# EAGLE board Main PCB (EAGLE 9.5.2)
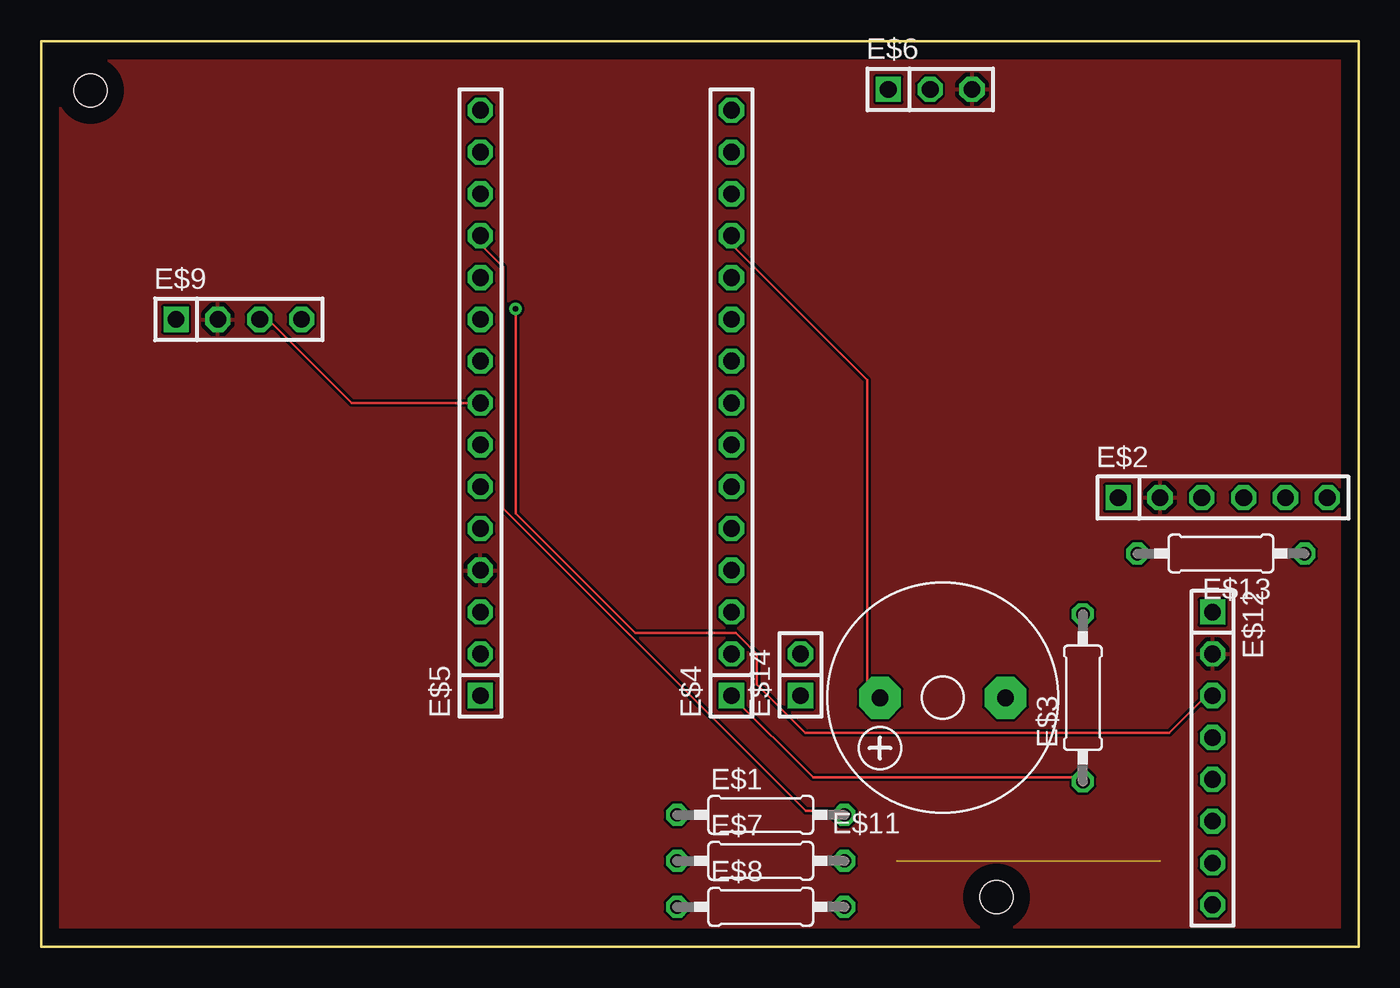
[diagram p0: board, top side]
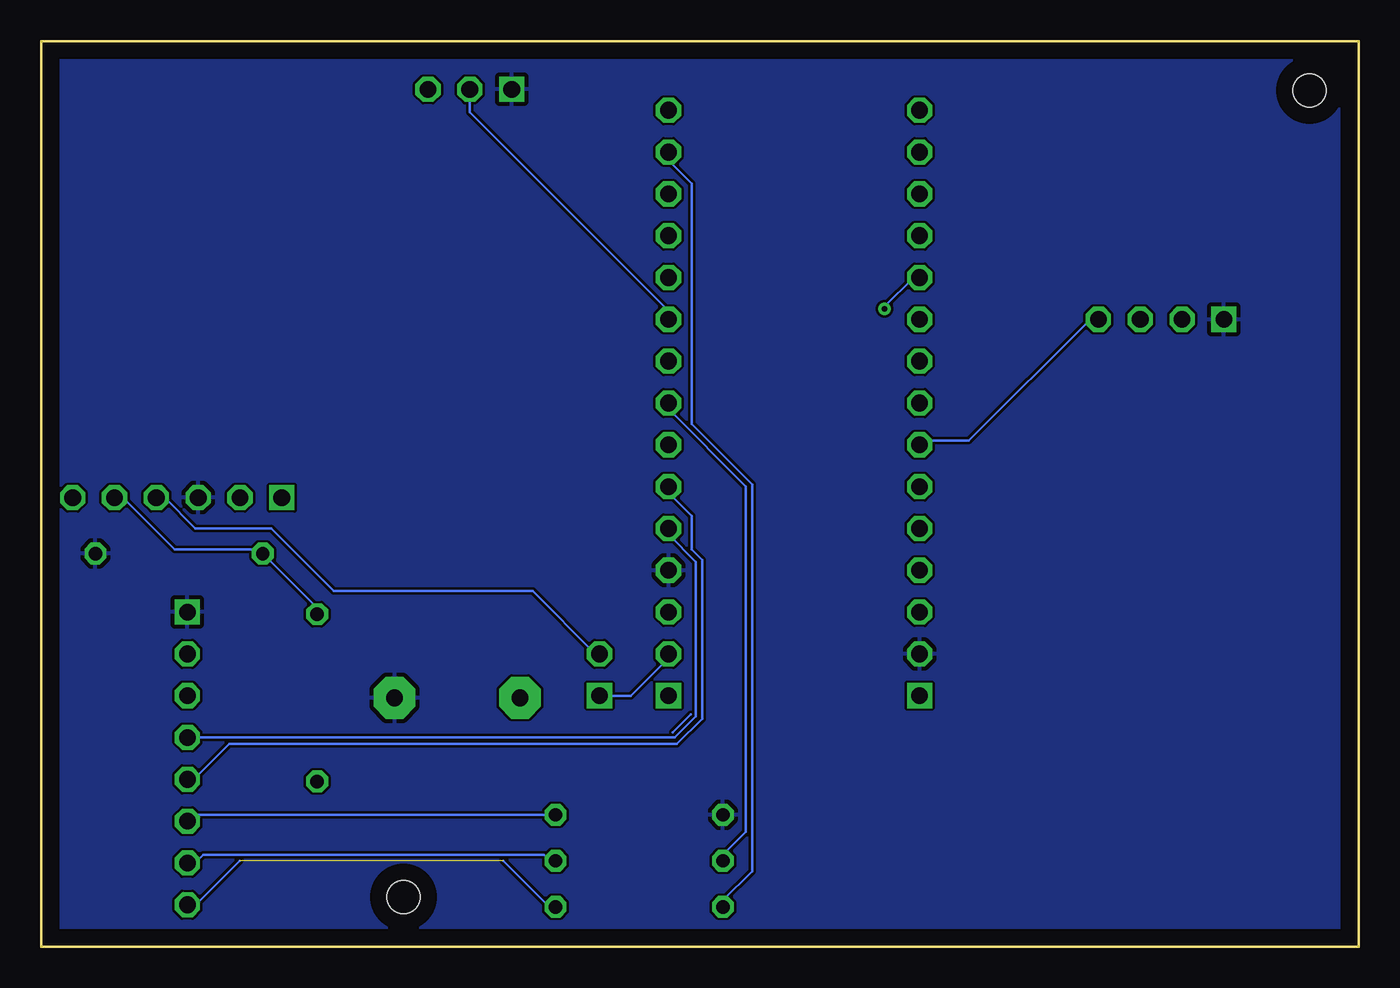
[diagram p1: board, bottom side, seen from below]

Size 80 x 55 mm. Coordinates in mm from the lower left corner, seen from the top.
Outline: 0,0 0,55 80,55 80,0 0,0
Copper layers (1*16): Top 0.035mm / dielectric 1.5mm / Bottom 0.035mm
Design rules "default *": minimum track width 6mil, minimum drill 0.35mm, track to track 6mil, track to pad 6mil, pad to pad 6mil, via to via 6mil, smd to smd 6mil, copper to edge 40mil, drill to drill 10mil, minimum pad ring 10mil, minimum via ring 8mil, stop-mask expansion 4mil, vias tented up to drill 0mil, thermal gap 10mil
Holes 2 mm at 3,52 58,3

## Footprints (pad centres in the part's own frame; a part is rotated, then mirrored left to right if it is on the bottom)
0207/10 = drill 0.813 octagon: 1 -5.08,0; 2 5.08,0
1X06 = drill 1.016 square: 1 -6.35,0 | drill 1.016 octagon: 2 -3.81,0; 3 -1.27,0; 4 1.27,0; 5 3.81,0; 6 6.35,0
1X15 = drill 1.016 square: 1 -17.78,0 | drill 1.016 octagon: 2 -15.24,0; 3 -12.7,0; 4 -10.16,0; 5 -7.62,0; 6 -5.08,0; 7 -2.54,0; 8 0,0; 9 2.54,0; 10 5.08,0; 11 7.62,0; 12 10.16,0; 13 12.7,0; 14 15.24,0; 15 17.78,0
1X03 = drill 1.016 square: 1 -2.54,0 | drill 1.016 octagon: 2 0,0; 3 2.54,0
1X04 = drill 1.016 square: 1 -3.81,0 | drill 1.016 octagon: 2 -1.27,0; 3 1.27,0; 4 3.81,0
F/CM12P = drill 1.016 pad 2.54 octagon: + 3.81,0; - -3.81,0
1X08 = drill 1.016 square: 1 -8.89,0 | drill 1.016 octagon: 2 -6.35,0; 3 -3.81,0; 4 -1.27,0; 5 1.27,0; 6 3.81,0; 7 6.35,0; 8 8.89,0
1X02 = drill 1.016 square: 1 -1.27,0 | drill 1.016 octagon: 2 1.27,0

## Placement (x,y rotation side)
E$1  [0207/10]  43.69,8 0 top
E$2  [1X06]  71.74,27.27 0 top
E$3  [0207/10]  63.25,15.11 90 top
E$4  [1X15]  41.91,33.02 90 top
E$5  [1X15]  26.67,33.02 90 top
E$6  [1X03]  53.98,52.07 0 top
E$7  [0207/10]  43.69,5.21 0 top
E$8  [0207/10]  43.69,2.41 0 top
E$9  [1X04]  12,38.1 0 top
E$11  [F/CM12P]  54.74,15.11 180 top
E$12  [1X08]  71.12,11.43 270 top
E$13  [0207/10]  71.63,23.88 180 top
E$14  [1X02]  46.1,16.51 90 top

## Library data of the parts
E$1 E$7 E$8 = ref-packages
E$2 E$4-E$6 E$9 E$12 E$14 = female headers
E$3 E$13 = rcl
E$11 = buzzer

## Nets
GND: E$1.1 E$2.3 E$4.4 E$5.2 E$6.1 E$9.1 E$11.- E$12.1 E$13.1
S$1: E$8.2 E$12.8
S$3: E$4.14 E$8.1
S$4: E$7.2 E$12.7
S$5: E$4.8 E$7.1
S$6: E$1.2 E$5.12 E$12.6
S$8: E$4.5 E$12.4
S$9: E$4.6 E$12.5
S$10: E$4.2 E$14.1
S$11: E$3.1 E$4.1
S$12: E$4.12 E$11.+
S$13: E$4.10 E$6.2
S$14: E$5.11 E$12.3
S$15: E$5.8 E$9.3
S$16: E$5.7 E$9.4
S$17: E$2.5 E$3.2 E$13.2
S$18: E$2.4 E$14.2
VCC: E$2.2 E$5.4 E$6.3 E$9.2 E$12.2

## Tracks (layer width: path | path; a pad name or v marks a point on that pad's centre or on a via)
GND
  pour Bottom: -3.81,59.69 85.09,59.69 85.09,-3.81 -2.54,-3.81 -2.54,58.42
S$1  (1 unrouted)
  Bottom 0.152: E$12.8 70.61,2.54 67.95,5.2 | 51.94,5.2 49.15,2.41 E$8.2
S$3
  Bottom 0.152: E$8.1 38.61,2.81 36.83,4.58 36.83,28.07 40.51,31.75 40.51,46.35 41.91,47.75 E$4.14
S$4
  Bottom 0.152: E$12.7 70.65,5.08 70.17,5.56 49.48,5.56 49.13,5.21 E$7.2
S$5
  Bottom 0.152: E$7.1 38.61,5.59 37.21,6.99 37.21,27.94 41.91,32.64 E$4.8
S$6
  Top 0.152: E$1.2 48.51,8.26 46.41,8.26 28.07,26.6 28.07,41.27 26.67,42.67 E$5.12
  Bottom 0.152: E$12.6 70.74,8 E$1.2
S$7
  Bottom 0.152: 40.56,14.1 41.66,13.01
S$8
  Bottom 0.152: E$4.5 41.91,25.02 40.26,23.37 40.26,13.97 41.53,12.7 E$12.4
S$9
  Bottom 0.152: E$12.5 70.74,10.16 68.58,12.32 41.4,12.32 39.88,13.84 39.88,23.5 40.51,24.13 40.51,26.16 41.91,27.56 E$4.6
S$10
  Bottom 0.152: E$14.1 44.2,15.24 41.91,17.53 E$4.2
S$11
  Top 0.152: E$4.1 46.86,10.29 62.99,10.29 E$3.1
S$12
  Top 0.152: E$4.12 41.91,42.67 50.16,34.42 50.16,15.88 E$11.+
S$13
  Bottom 0.152: E$4.10 41.91,38.61 53.98,50.67 E$6.2
S$14  (via drill 0.35)
  Top 0.152: E$12.3 70.74,15.24 68.48,12.98 46.38,12.98 43.43,15.93 43.43,17.78 42.16,19.05 36.07,19.05 28.8,26.32 v28.8,38.73
  Bottom 0.152: v28.8,38.73 28.8,38.86 27.02,40.64 E$5.11
S$15
  Top 0.152: E$9.3 13.78,38.1 18.86,33.02 E$5.8
S$16
  Bottom 0.152: E$9.4 16.32,38.1 23.68,30.73 26.42,30.73 E$5.7
S$17
  Bottom 0.152: E$3.2 63.25,20.57 E$13.2 66.8,24.13 71.9,24.13 75.04,27.27 E$2.5
S$18
  Bottom 0.152: E$14.2 46.35,17.78 50.16,21.59 62.23,21.59 66.04,25.4 70.63,25.4 72.5,27.27 E$2.4
VCC
  pour Top: -10.16,63.5 -10.16,-6.35 91.44,-6.35 91.44,64.77 -8.89,64.77

## Text on the board
tText: D13 | D12 | GND | OUT | 5V | 3V3 | D11 | AREF | D10 | A0 | D9 | HM-10 | antenna facing PCB | A1 | D8 | A2 | D7 | DHT11 | sensor facing up | GND | 5V | SDA | SCL | A3 | D6 | SDA | ARDUINO NANO R3 | D5 | SCL | D4 | 5V | GND | TX | RX | A6 | D3 | A7 | D2 | 2k | 5V | GND | DS3231 | RST | RST | BUZZER | GND | battery facing up | GND | RX | 12mm | 5V | VIN | TX | 1k | MIC | J1 | DT | HEADERS | CLK | 10k | LI_SEN | 330 | LED | BTN | 1k
bText: + | HEADERS | 3D Clock / rev4
210bmp: I:/Moji podaci/Youtube/Vizualni dio/PCB/PCB dno logo.bmp